# Altium PCB MAGIsDebugger-STLink-Python.PcbDoc
Units mil, origin at the board's own origin, x right, y up, seen from the top; angles counter-clockwise.
Board outline 6000 x 4000 mil, 2 copper layers (Top Layer, Bottom Layer); 29 components, 23 nets, 158 pads, 17 vias.
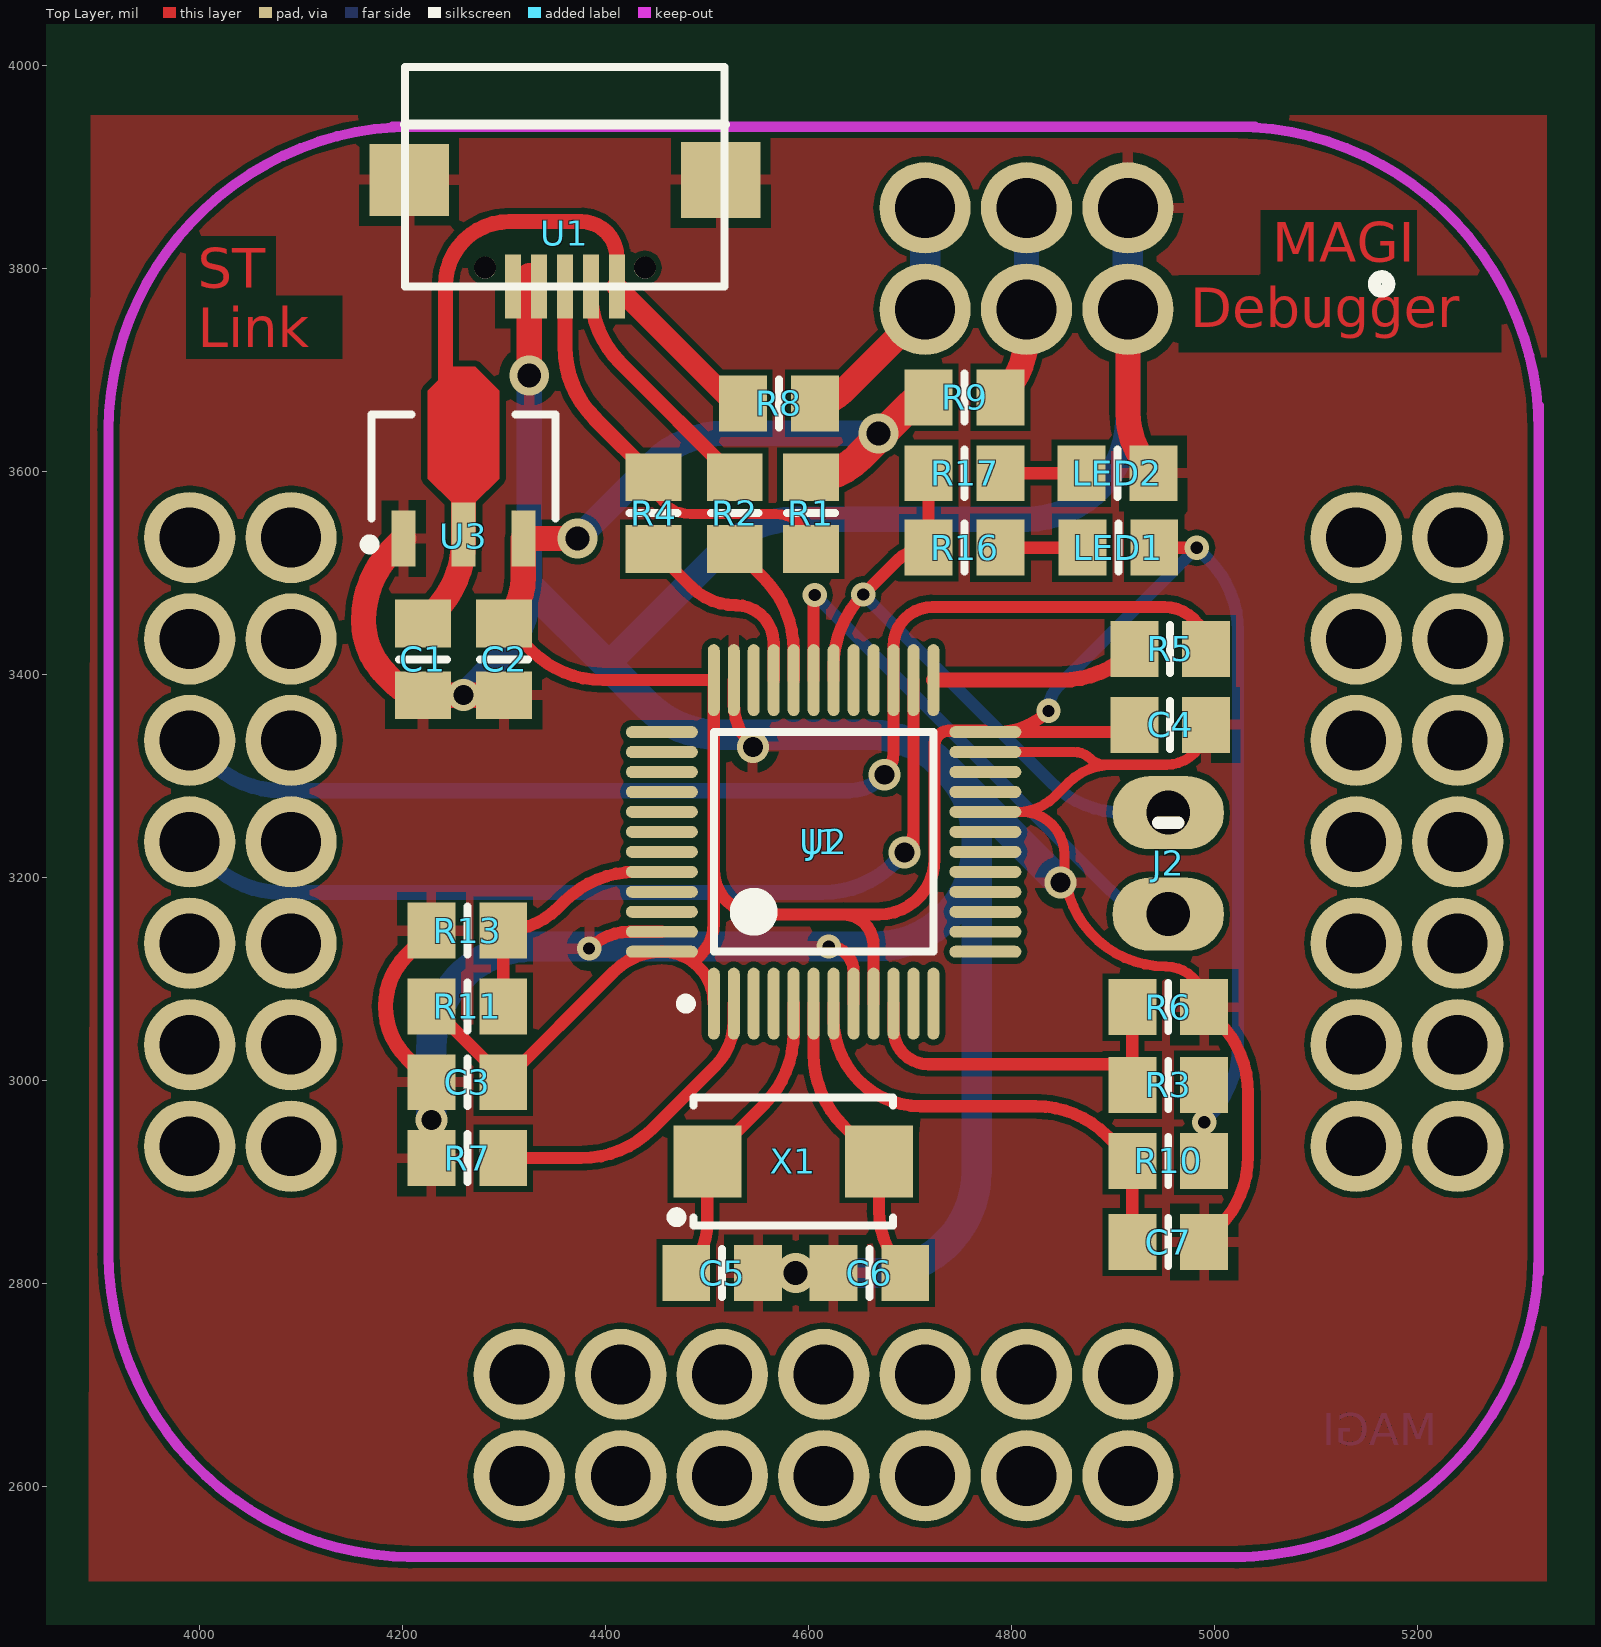
[diagram p0: Top Layer view]
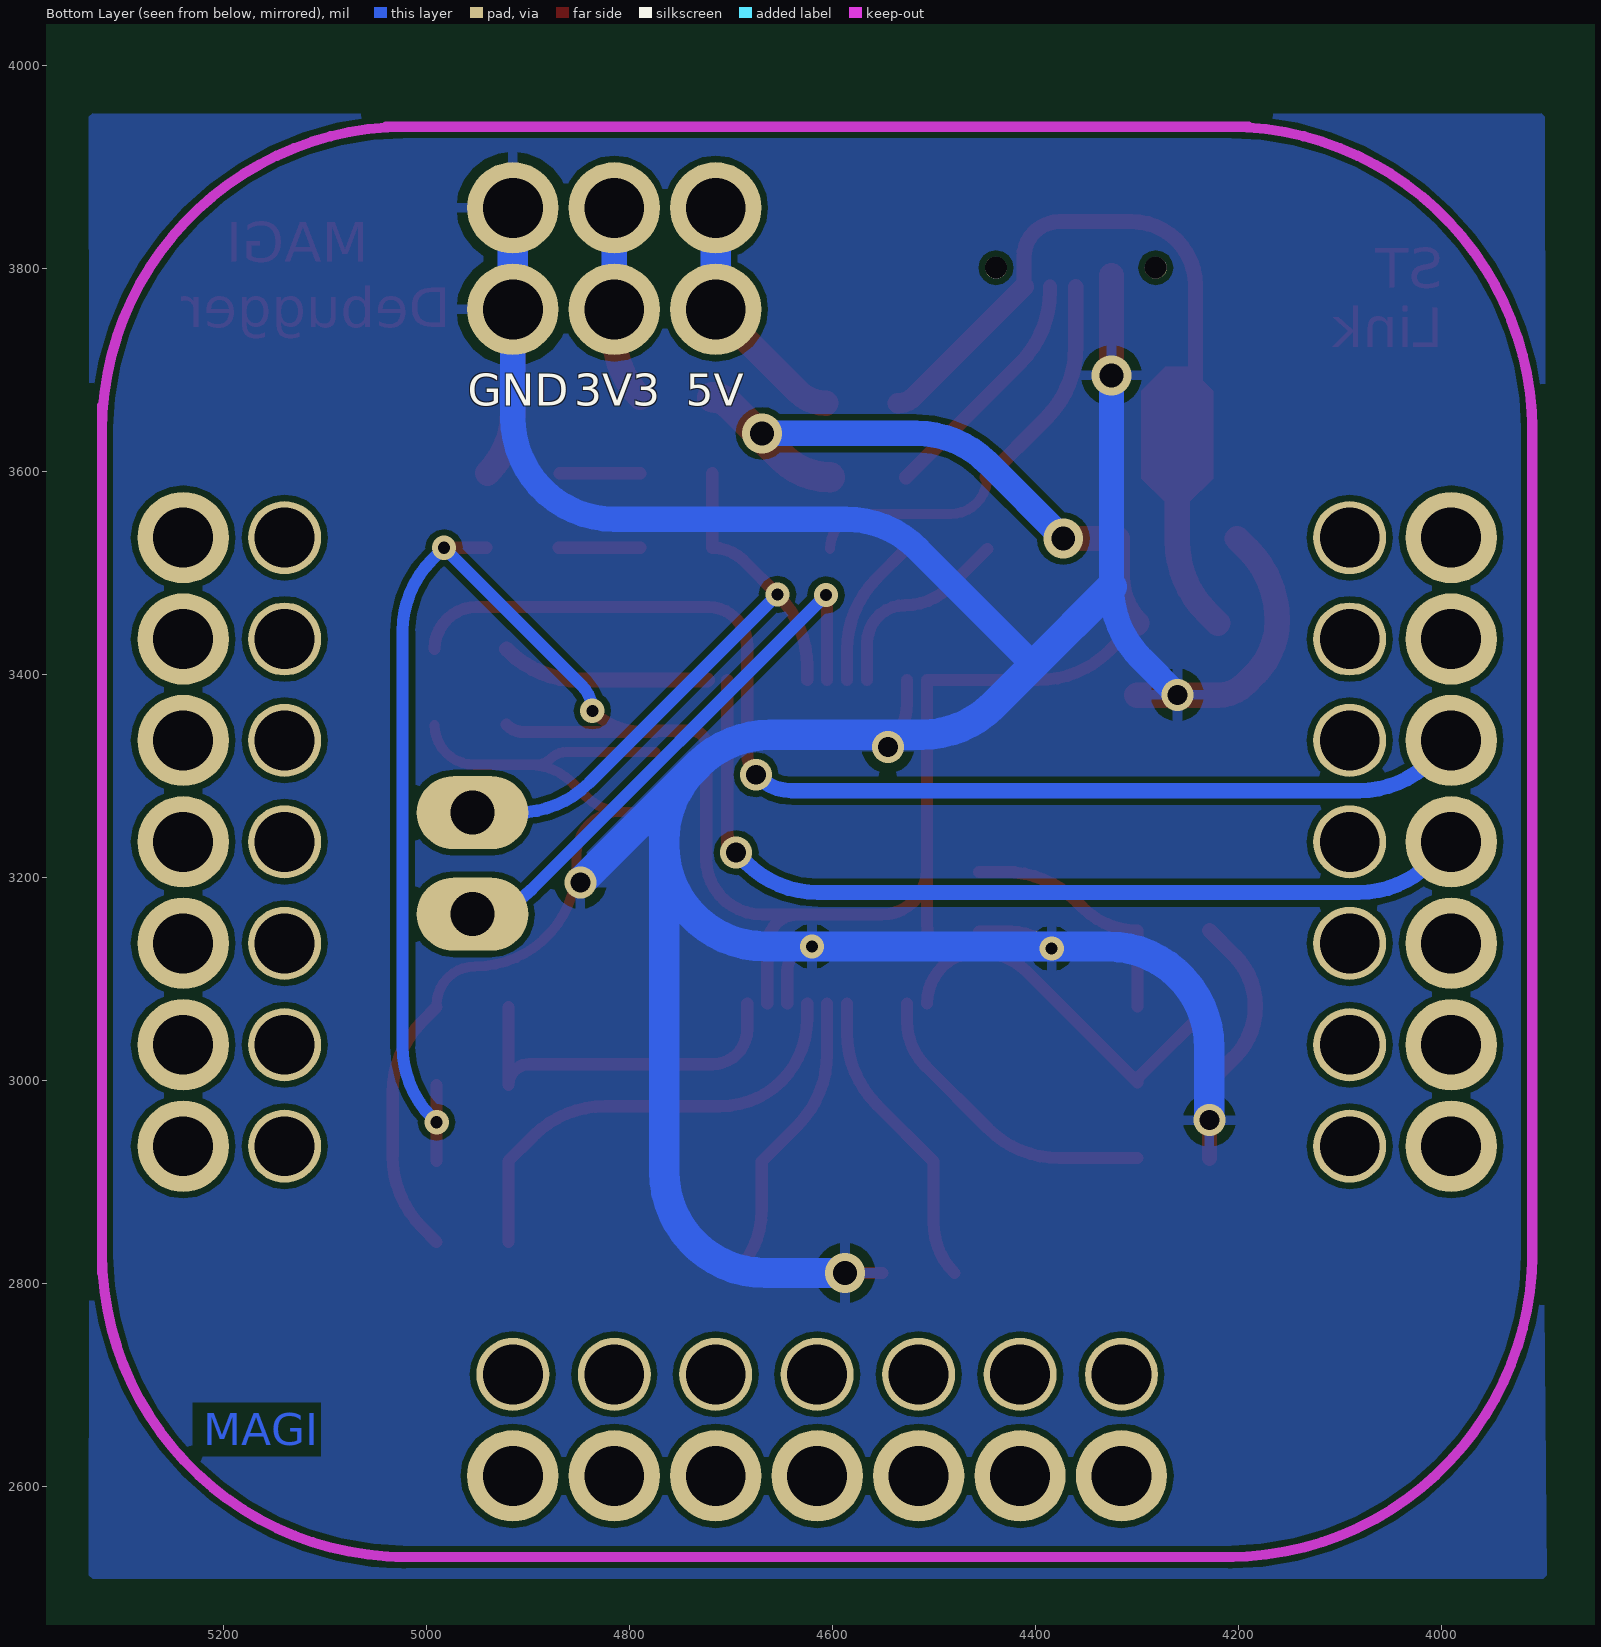
[diagram p1: Bottom Layer view, seen from below]

## Layer stack, top to bottom
Top Solder: solder mask 0.4, Solder Resist, Dk 3.5
Top Layer: signal copper 1.4
Dielectric 1: dielectric 12.6, FR-4, Dk 4.8
Bottom Layer: signal copper 1.4
Bottom Solder: solder mask 0.4, Solder Resist, Dk 3.5

## Board outline
1000,1000 7000,1000 7000,5000 1000,5000

## Design rules (kind name [scope] priority, off if disabled: settings)
Clearance [All] p1: gap=6
PolygonConnect [All] p1: connectstyle=Relief reliefconductorwidth=10 reliefentries=4 polygonreliefangle="90 Angle" airgapwidth=10
RoutingVias [All] p1: holewidth=28 width=50 viastyle="Through Hole" minholewidth=12 minwidth=24 maxholewidth=280 maxwidth=500
SolderMaskExpansion [All] p1: expansion=4
Width [All] p1: maxlimit=100 minlimit=6 preferedwidth=10
29 further rules are at their usual default settings.

## Components (designator, comment, footprint, x,y, rotation, side; value= is the part's Value field where it differs from the comment)
C1 "10uf" 6-0805_n 4220,3415 r270 top
C2 "10uf" 6-0805_n 4300,3415 r270 top
C3 "10uf" 6-0805_n 4263.78,2998.03 r180 top
C4 "10uf" 6-0805_N 4956.69,3350.39 r0 top
C5 "15PF" 6-0805_n 4515,2810 r180 top
C6 "15PF" 6-0805_n 4660,2810 r0 top
C7 "104" 6-0805_n 4954.72,2840.55 r180 top
J1 "MAGIsBoard-Python" MAGIsBoard-Python 4615,3235 r0 top
J2 "CON2" SIP2 4954.72,3263.78 r270 top
LED1 "LED_3" 6-0805_n 4905.51,3525 r180 top
LED2 "LED_3" 6-0805_n 4904.57,3598.42 r0 top
R1 "10K" 6-0805_n 4602.36,3559.06 r270 top
R2 "10K" 6-0805_n 4527.36,3559.06 r270 top
R3 "10K" 6-0805_n 4954.72,2995.35 r0 top
R4 "10K" 6-0805_n 4447.36,3559.06 r270 top
R5 "100" 6-0805_n 4956.69,3425.2 r180 top
R6 "10K" 6-0805_n 4954.72,3072.13 r180 top
R7 "10K" 6-0805_n 4263.78,2923.23 r0 top
R8 "0" 6-0805_n 4570.87,3667.32 r0 top
R9 "0" 6-0805_n 4753.94,3673.23 r0 top
R10 "10K" 6-0805_n 4954.72,2920.55 r0 top
R11 "10K" 6-0805_n 4263.78,3072.83 r180 top
R13 "10K" 6-0805_n 4263.78,3147.64 r0 top
R16 "RES1_1" 6-0805_n 4753.94,3525 r180 top
R17 "RES1_1" 6-0805_n 4753.94,3598.43 r180 top
U1 "USB" microUSB 4360,3805 r0 top
U2 "STM32F103CBT6" LQFP48_N 4615,3235 r90 top
U3 "HS7333" HS7333 4260,3605 r90 top
X1 "8M" 5032 4595,2920 r270 top

## Footprints (in the part's own frame and the unit in brackets; to place one, negate y for a bottom-side part, rotate by r counter-clockwise, add the part's x,y. Pads: shape width x height; smd on the part's side, far side on the other; paste and mask are expansions set on the pad)
6-0805_n [mm] "Chip Resistor, Body 2.0x1.2mm, IPC Medium Density"
  rect 1.2x1.4 smd: 1(-0.9,0) 2(0.9,0)
  silkscreen extent 0,-0.6 0,0.6, body extent -1.07,-0.7 1.07,0.7, height 0.7
6-0805_N [mm] "Chip Resistor, Body 2.0x1.2mm, IPC Medium Density"
  rect 1.2x1.4 smd: 1(-0.9,0) 2(0.9,0)
  silkscreen extent 0,-0.6 0,0.6, body extent -1.07,-0.7 1.07,0.7, height 0.7
5032 [mm]
  rect 1.8x1.7 smd: 1(0,-2.404) 2(0,1.896)
  silkscreen extent -1.6,-3.3 1.6,2.25
HS7333 [mm] "SOT89, 3-Leads, Body 4.50x2.50mm, Pitch 1.50mm, Lead Span 4.1mm, IPC Medium Density"
  rect 1.4x0.6 smd: 1(-1.8,1.5) 3(-1.8,-1.5)
  rect 1.6x0.6 smd: 2(-1.7,0)
  Top Layer region: -0.9,0.3 -0.3,0.9 1.9,0.9 2.5,0.3 2.5,-0.3 1.9,-0.9 -0.3,-0.9 -0.9,-0.3
  silkscreen extent -2.07,-2.3 1.3,2.47, body extent -1.3,-2.3 1.3,2.3, height 1.6
LQFP48_N [mm] "Thin QFP, 48-Leads, Body 7x7mm, Pitch 0.5mm, IPC Medium Density"
  oval 1.8x0.3 smd: 1(-4.05,2.75) 2(-4.05,2.25) 3(-4.05,1.75) 4(-4.05,1.25) 5(-4.05,0.75) 6(-4.05,0.25) 7(-4.05,-0.25) 8(-4.05,-0.75) 9(-4.05,-1.25) 10(-4.05,-1.75) 11(-4.05,-2.25) 12(-4.05,-2.75) 25(4.05,-2.75) 26(4.05,-2.25) 27(4.05,-1.75) 28(4.05,-1.25) 29(4.05,-0.75) 30(4.05,-0.25) 31(4.05,0.25) 32(4.05,0.75) 33(4.05,1.25) 34(4.05,1.75) 35(4.05,2.25) 36(4.05,2.75)
  oval 0.3x1.8 smd: 13(-2.75,-4.05) 14(-2.25,-4.05) 15(-1.75,-4.05) 16(-1.25,-4.05) 17(-0.75,-4.05) 18(-0.25,-4.05) 19(0.25,-4.05) 20(0.75,-4.05) 21(1.25,-4.05) 22(1.75,-4.05) 23(2.25,-4.05) 24(2.75,-4.05) 37(2.75,4.05) 38(2.25,4.05) 39(1.75,4.05) 40(1.25,4.05) 41(0.75,4.05) 42(0.25,4.05) 43(-0.25,4.05) 44(-0.75,4.05) 45(-1.25,4.05) 46(-1.75,4.05) 47(-2.25,4.05) 48(-2.75,4.05)
  silkscreen extent -4.17,-2.75 2.75,3.57, body extent -3.5,-3.5 3.5,3.5, height 1.6
MAGIsBoard-Python [mil]
  round 90 hole 59.06: 1(300,525) 1(300,625) 2(200,525) 2(200,625) 3(100,525) 3(100,625) 29(-625,300) 30(-625,200) 31(-625,100) 32(-625,0) 33(-625,-100) 34(-625,-200) 35(-625,-300) 36(-300,-625) 37(-200,-625) 38(-100,-625) 39(0,-625) 40(100,-625) 41(200,-625) 42(300,-625) 43(625,-300) 44(625,-200) 45(625,-100) 46(625,0) 47(625,100) 48(625,200) 49(625,300)
  round 90 / inner round 72 / far side round 72 hole 59.06: 8(-525,300) 9(-525,200) 10(-525,100) 11(-525,0) 12(-525,-100) 13(-525,-200) 14(-525,-300) 15(-300,-525) 16(-200,-525) 17(-100,-525) 18(0,-525) 19(100,-525) 20(200,-525) 21(300,-525) 22(525,-300) 23(525,-200) 24(525,-100) 25(525,0) 26(525,100) 27(525,200) 28(525,300)
  Keep-Out Layer lines w10: -705,-415 -705,415 ; -705,-405 ccw(c-405,-405) -405,-705 ; -705,405 cw(c-405,405) -405,705 ; -425,705 425,705 ; -410,-705 415,-705 ; 405,-705 ccw(c405,-405) 705,-405 ; 405,705 cw(c405,405) 705,405 ; 705,-425 705,430
  silkscreen extent 543,543 557,557
microUSB [mm]
  round 0.55 hole 0.55: 0(-2,-0.1) 0(2,-0.1)
  rect 0.4x1.6 smd: 1(1.3,-0.576) 2(0.65,-0.576) 3(0,-0.576) 4(-0.65,-0.576) 5(-1.3,-0.576)
  rect 2x1.8 smd: 6(-3.9,2.1)
  rect 2x1.9 smd: 7(3.9,2.1)
  silkscreen extent -4,-0.58 4,4.92, body extent -4.1,-0.68 4.1,5.02, height 3
SIP2 [mil]
  oval 72x110 hole 43.31: 1(0,0) 2(100,0)
  silkscreen extent 10,-10 10,10

## Part data
C1 C2 C3 C4: library part "CAPACITOR POL", "Capacitor"
C5 C6 C7: library part CAP
J2: "Connector"
R1 R2 R3 R4 R5 R6 R7 R8 R9 R10 R11 R13: library part RES
U2: "STM32 ARM-based 32-bit MCU with 128 Kbytes Flash, 48-pin LQFP, Industrial Temperature"
X1: library part CRYSTAL

## Via types
v1: diameter 24, hole 12, Top Layer to Bottom Layer, 7 vias
v2: diameter 31.5, hole 19.68, Top Layer to Bottom Layer, 6 vias
v3: diameter 39.37, hole 23.62, Top Layer to Bottom Layer, 4 vias

## Nets (pads, with @x,y where several pads share a name; then routed paths per layer and width w, separated by ;. In a path a pad name is that pad's centre, name@x,y a point inside that pad or via, vN(x,y) a via of type N, cw(c..) or ccw(c..) an arc to the next point about the centre after c; other vN are vias at no path point)
3.3V: C2.1 C3.1 C4.1 LED1.1 R1.1 R3.2 R9.1 R10.2 R11.2 U2.1 U2.9 U2.24 U2.36 U2.48 U3.3 | length 3207.9
  Top Layer w12: R11.2 4296.43,3004.75 cw(c4289.71,2998.03) C3.1 4408.37,3107.19 cw(c4455.55,3060) U2.48 cw(c4455.55,3075.55) 4485.47,3117.07 ; C2.1 4326.7,3423.74 ccw(c4397.41,3494.45) 4397.41,3394.45 U2.36 4506.73,3207.83 ; U2.1 ccw(c4455.55,3075.55) 4485.47,3117.07 ; U2.9 4664.21,3133.03 ccw(c4633.86,3133.03) 4633.86,3163.39 ; v1(4836.61,3364.17) cw(c4786.14,3414.64) U2.24@4786.14,3343.27 ; C4.1 cw(c4904.06,3367.6) 4904.06,3343.27 U2.24@4786.14,3343.27 ; LED1.1 v1(4982.83,3525) ccw(c4982.83,3527.02) v1@4984.25,3525.59 ; R10.2 R3.2 ; 4485.47,3117.07 ccw(c4485.47,3121.13) 4488.33,3118.25 4494.09,3124.02 ccw(c4463.58,3154.53) 4506.73,3154.53 4506.73,3207.83 ; 4506.73,3207.83 ccw(c4551.18,3207.83) 4551.18,3163.39 4633.86,3163.39 ; 4633.86,3163.39 4669.29,3163.39 ccw(c4669.29,3218.5) 4724.41,3218.5 4724.41,3330.71 cw(c4738.19,3330.71) 4738.19,3344.49 4773.23,3344.49 cw(c4773.23,3343.27) U2.24 U2.24@4786.14,3343.27
  Top Layer w25: C2.1 ccw(c4253.99,3496.44) 4319.06,3496.44 U3.3 v3(4372.4,3534.13) cw(c4372.4,3531.85) v3@4374.02,3533.46
  Top Layer w30: R1.1 ccw(c4602.36,3661.02) 4649.41,3613.98 4701.7,3666.27 cw(c4718.5,3649.47) R9.1
  Bottom Layer w12: v1(4836.61,3364.17) cw(c4871.9,3364.17) 4846.95,3389.12 v1(4982.83,3525) 4994.33,3513.49 cw(c4923.62,3442.78) 5023.62,3442.78 5023.62,3033.55 cw(c4923.62,3033.55) 4994.33,2962.84 v1(4990.16,2958.66)
  Bottom Layer w25: v3(4372.4,3534.13) 4446.77,3608.51 cw(c4517.48,3537.8) 4517.48,3637.8 v3(4669.29,3637.8)
5V: C1.1 R8.1 U1.1 U3.2 | length 740.1
  Top Layer w15: 4246.06,3631.89 cw(c4246.06,3635.83) 4242.13,3635.83 4242.13,3783.46 cw(c4305.12,3783.46) 4305.12,3846.46 4375.98,3846.46 cw(c4375.98,3811.26) 4411.18,3811.26 U1.1
  Top Layer w20: U1.1 4519.67,3673.85 ccw(c4535.43,3689.61) R8.1
  Top Layer w25: C1.1 4230.71,3461.14 ccw(c4160,3531.86) 4260,3531.86 U3.2 4260,3588.54 ccw(c4246.02,3588.54) 4255.91,3598.43
BOOT0: R11.1 R13.2 U2.44 | length 247.5
  Top Layer w12: R11.1 R13.2 ccw(c4299.21,3223.68) 4352.98,3169.91 4359.25,3176.18 cw(c4429.96,3105.47) 4429.96,3205.47 U2.44
GND: C1.2 C2.2 C3.2 C4.2 C5.1 C6.1 C7.1 J1.1 LED2.2 R6.1 R7.1 R13.1 U1.4 U1.5 U1.6 U1.7 U2.8 U2.20 U2.23 U2.35 U2.47 U3.1 | length 5225.5
  Top Layer w10: U2.20 U2.20@4806.31,3264.53 ; U2.23 4861.89,3323.58 cw(c4861.89,3300.87) 4877.95,3316.93 ccw(c4892.21,3331.19) 4892.21,3311.02 4899.61,3311.02 ; R6.1 4990.16,3074.41 ccw(c4952.36,3074.41) 4952.36,3112.2 cw(c4952.36,3212.2) 4852.36,3212.2 4852.36,3222.44 ccw(c4810.28,3222.44) 4810.28,3264.53 U2.20@4806.31,3264.53 ; C4.2 cw(c4952.76,3350.39) 4952.76,3311.02 4899.61,3311.02 ; U2.20@4806.31,3264.53 ccw(c4806.31,3315.74) 4842.52,3279.53 4855.92,3292.93 cw(c4899.61,3249.24) 4899.61,3311.02
  Top Layer w12: v1(4383.86,3129.92) cw(c4423.68,3090.09) 4423.68,3146.42 U2.47 ; U2.35 4526.42,3371.48 ccw(c4584.08,3371.48) v2@4543.31,3330.71 ; C5.1 v3(4587.5,2810) C6.1 ; v1(4620.08,3131.89) cw(c4620.08,3107.44) 4644.53,3107.44 U2.8 ; C7.1 5004.18,2854.57 ccw(c4933.46,2925.28) 5033.46,2925.28 5033.46,2987.4 ccw(c4933.46,2987.4) 5004.18,3058.11 R6.1
  Top Layer w15: R7.1 C3.2 4203.95,3022.43 cw(c4254.36,3072.83) 4183.07,3072.83 cw(c4254.36,3072.83) 4203.95,3123.24 R13.1
  Top Layer w25: U3.1 4190.71,3523.9 ccw(c4261.42,3453.19) 4161.42,3453.19 ccw(c4235.97,3453.19) 4178.44,3405.77 ccw(c4235.97,3453.19) 4183.25,3400.47 4192.96,3390.77 ccw(c4220,3417.81) C1.2 C2.2 ; v3(4324.8,3694.88) 4324.8,3793.31 ; J1.1@4935.71,3780.71 4915,3760 4915,3658.78 ccw(c5000.36,3658.78) LED2.2
  Bottom Layer w25: v2(4259.84,3379.92) 4295.51,3415.59 ccw(c4224.8,3486.3) 4324.8,3486.3 v3(4324.8,3694.88) ; 4401.62,3409.49 4515.99,3523.86 cw(c4586.7,3453.15) 4586.7,3553.15 4815,3553.15 ccw(c4815,3653.15) 4915,3653.15 J1.1@4915,3760
  Bottom Layer w30: v2(4228.35,2960.63) 4228.35,3031.89 cw(c4328.35,3031.89) 4328.35,3131.89 v1(4620.08,3131.89) 4665.75,3131.89 ccw(c4665.75,3231.89) 4765.75,3231.89 ; 4324.8,3486.3 4401.62,3409.49 4441.27,3369.84 ccw(c4511.98,3440.55) 4511.98,3340.55 4661.33,3340.55 cw(c4661.33,3240.55) 4732.05,3311.26 4736.46,3306.85 ; v3(4587.5,2810) 4665.75,2810 ccw(c4665.75,2910) 4765.75,2910 4765.75,3231.89 ; v2(4848.43,3194.88) 4736.46,3306.85 ; J1.1@4915,3760 J1.1@4915,3860 ; 4736.46,3306.85 cw(c4665.75,3236.14) 4765.75,3236.14 4765.75,3231.89
  other v2: 4545.28,3328.74
LED: J2.1 R16.2 R17.2 U2.30 | length 632.7
  Top Layer w12: U2.30 4624.84,3408.22 cw(c4724.84,3408.22) v1(4654.13,3478.93) 4687.25,3512.05 cw(c4718.5,3480.8) R16.2 R17.2
  Bottom Layer w12: v1(4654.13,3478.93) 4840,3293.07 ccw(c4910.71,3363.78) 4910.71,3263.78 J2.1
NetJ1_2: J1.2 R9.2 | length 222.9
  Top Layer w25: R9.2 ccw(c4727.49,3735.1) 4815,3735.1 4815,3760 J1.2@4835.71,3780.71
  Bottom Layer w25: J1.2@4815,3760 J1.2@4815,3860
NetJ1_3: J1.3 R8.2 | length 274.7
  Top Layer w25: R8.2 ccw(c4606.3,3706) 4633.65,3678.65 J1.3@4735.71,3780.71
  Bottom Layer w30: J1.3@4715,3760 J1.3@4715,3860
NetLED1_2: LED1.2 R16.1 | length 80.7
  Top Layer w12: R16.1 LED1.2
NetLED2_1: LED2.1 R17.1 | length 79.8
  Top Layer w12: R17.1 LED2.1
NetR2_2: R2.2 U2.32 | length 148.9
  Top Layer w12: R2.2 4556.18,3494.8 cw(c4485.47,3424.09) 4585.47,3424.09 U2.32
NetR4_2: R4.2 U2.33 | length 196.5
  Top Layer w12: R4.2 4484.5,3486.49 ccw(c4528.49,3530.48) 4498.15,3476.17 ccw(c4528.49,3530.48) 4528.49,3468.26 cw(c4528.49,3430.97) 4565.79,3430.97 U2.33
NetR5_2: R5.2 U2.25 | length 206.4
  Top Layer w15: U2.25 4849.09,3394.45 ccw(c4849.09,3494.45) 4919.8,3423.74 R5.2
NetR7_2: R7.2 U2.2 | length 308.6
  Top Layer w12: R7.2 4375.9,2923.23 ccw(c4375.9,3023.23) 4446.61,2952.52 4507.87,3013.78 ccw(c4463.1,3058.55) 4526.42,3058.55 U2.2
NRST: C7.2 R10.1 U2.7 | length 456.8
  Top Layer w12: U2.7 4624.84,3060.2 ccw(c4710.63,3060.2) 4710.63,2974.41 4824.01,2974.41 cw(c4824.01,2874.41) 4894.72,2945.12 R10.1 C7.2
OSC_IN: C5.2 U2.5 X1.1 | length 302.1
  Top Layer w12: C5.2 ccw(c4429.38,2860.19) 4500.35,2860.19 X1.1 4556.18,2975.83 ccw(c4485.47,3046.54) 4585.47,3046.54 U2.5
OSC_OUT: C6.2 U2.6 X1.2 | length 294.9
  Top Layer w12: U2.6 4605.16,3025.91 ccw(c4705.16,3025.91) 4634.45,2955.2 X1.2 4669.65,2872.26 ccw(c4757.69,2872.26) C6.2
PA0-VREF: R3.1 R6.2 U2.10 | length 368.8
  Top Layer w12: U2.10 4683.9,3050.35 ccw(c4718.5,3050.35) 4718.5,3015.75 4898.9,3015.75 cw(c4898.9,2995.35) R3.1 R6.2
PA10: J2.2 U2.31 | length 559.4
  Top Layer w12: U2.31 4605.16,3475.59 cw(c4609.05,3475.59) v1(4606.3,3478.35)
  Bottom Layer w12: v1(4606.3,3478.35) 4896.92,3187.72 ccw(c4954.72,3245.52) J2.2
TCK: J1.32 U2.26 | length 937
  Top Layer w12: v2(4694.88,3224.41) ccw(c4673.88,3245.41) 4703.58,3245.41 ; v2@4703.58,3223.27 4703.58,3245.41 ; U2.26 4703.58,3245.41
  Bottom Layer w12: v2(4694.88,3224.41) 4702.44,3224.41 v2@4703.58,3223.27
  Bottom Layer w15: J1.32 4010.67,3214.33 ccw(c4081.38,3285.04) 4081.38,3185.04 4614.09,3185.04 ccw(c4614.09,3285.04) 4684.8,3214.33 v2(4694.88,3224.41)
TMS: J1.31 R5.1 U2.27 | length 1186.1
  Top Layer w12: v2(4675.2,3301.18) ccw(c4654.19,3322.19) 4683.9,3322.19 U2.27 4683.9,3427.99 cw(c4722.44,3427.99) 4722.44,3466.54 4950.79,3466.54 cw(c4950.79,3425.2) R5.1
  Bottom Layer w15: J1.31 4010.28,3314.72 ccw(c4080.99,3385.43) 4080.99,3285.43 4639.96,3285.43 ccw(c4639.96,3332.48) v2@4673.23,3299.21
TRST: J1.28
USBDM: R2.1 U1.2 | length 242.3
  Top Layer w14: U1.2 4385.59,3777.68 ccw(c4485.59,3777.68) 4414.88,3706.97 R2.1
USBDP: R1.2 R4.1 U1.3 | length 415.2
  Top Layer w10: R4.1 ccw(c4483.61,3594.49) 4483.61,3558.24 4567.74,3558.24 cw(c4567.74,3523.62) R1.2
  Top Layer w15: U1.3 4360,3723.27 ccw(c4460,3723.27) 4389.29,3652.56 R4.1
pads on no net: J1.8 J1.9 J1.10 J1.11 J1.12 J1.13 J1.14 J1.15 J1.16 J1.17 J1.18 J1.19 J1.20 J1.21 J1.22 J1.23 J1.24 J1.25 J1.26 J1.27 J1.29 J1.30 J1.33 J1.34 J1.35 J1.36 J1.37 J1.38 J1.39 J1.40 J1.41 J1.42 J1.43 J1.44 J1.45 J1.46 J1.47 J1.48 J1.49 U1.0 U2.3 U2.4 U2.11 U2.12 U2.13 U2.14 U2.15 U2.16 U2.17 U2.18 U2.19 U2.21 U2.22 U2.28 U2.29 U2.34 U2.37 U2.38 U2.39 U2.40 U2.41 U2.42 U2.43 U2.45 U2.46

## Polygon pours and split planes (outlines as drawn)
GND on Bottom Layer "Bottom Layer-No Net" (solid, pour order 2): 3897.78,3953.45 5332.82,3953.45 5332.82,2508.56 3895.81,2508.56
GND on Top Layer "Bottom Layer-No Net" (solid, pour order 4): 3892.77,3951.27 5327.81,3951.27 5327.81,2506.38 3890.81,2506.38 3890.81,2513.07

## Other copper
Top Layer:
  text "MAGI" at 5057.09,3807.09 h39.37
  text "ST" at 3998.03,3781.5 h39.37
  text "Debugger" at 4976.38,3742.13 h39.37
  text "Link" at 3998.03,3722.44 h39.37

## Text inside footprints (layer, text, board x,y; h text height)
J1: Bottom Overlay "GND" at 4959.57,3664.84 h31.5; Bottom Overlay "3V3" at 4854.57,3664.84 h31.5; Bottom Overlay "5V" at 4744.57,3664.84 h31.5; Bottom Layer "MAGI" at 5220,2640 h31.5